# Altium PCB Main_pcb.PcbDoc
Units mm, origin at the board's own origin, x right, y up, seen from the top; angles counter-clockwise.
Board outline 77.22 x 57.4 mm, 2 copper layers (Top Layer, Bottom Layer); 19 components, 38 nets, 87 pads, 0 vias.
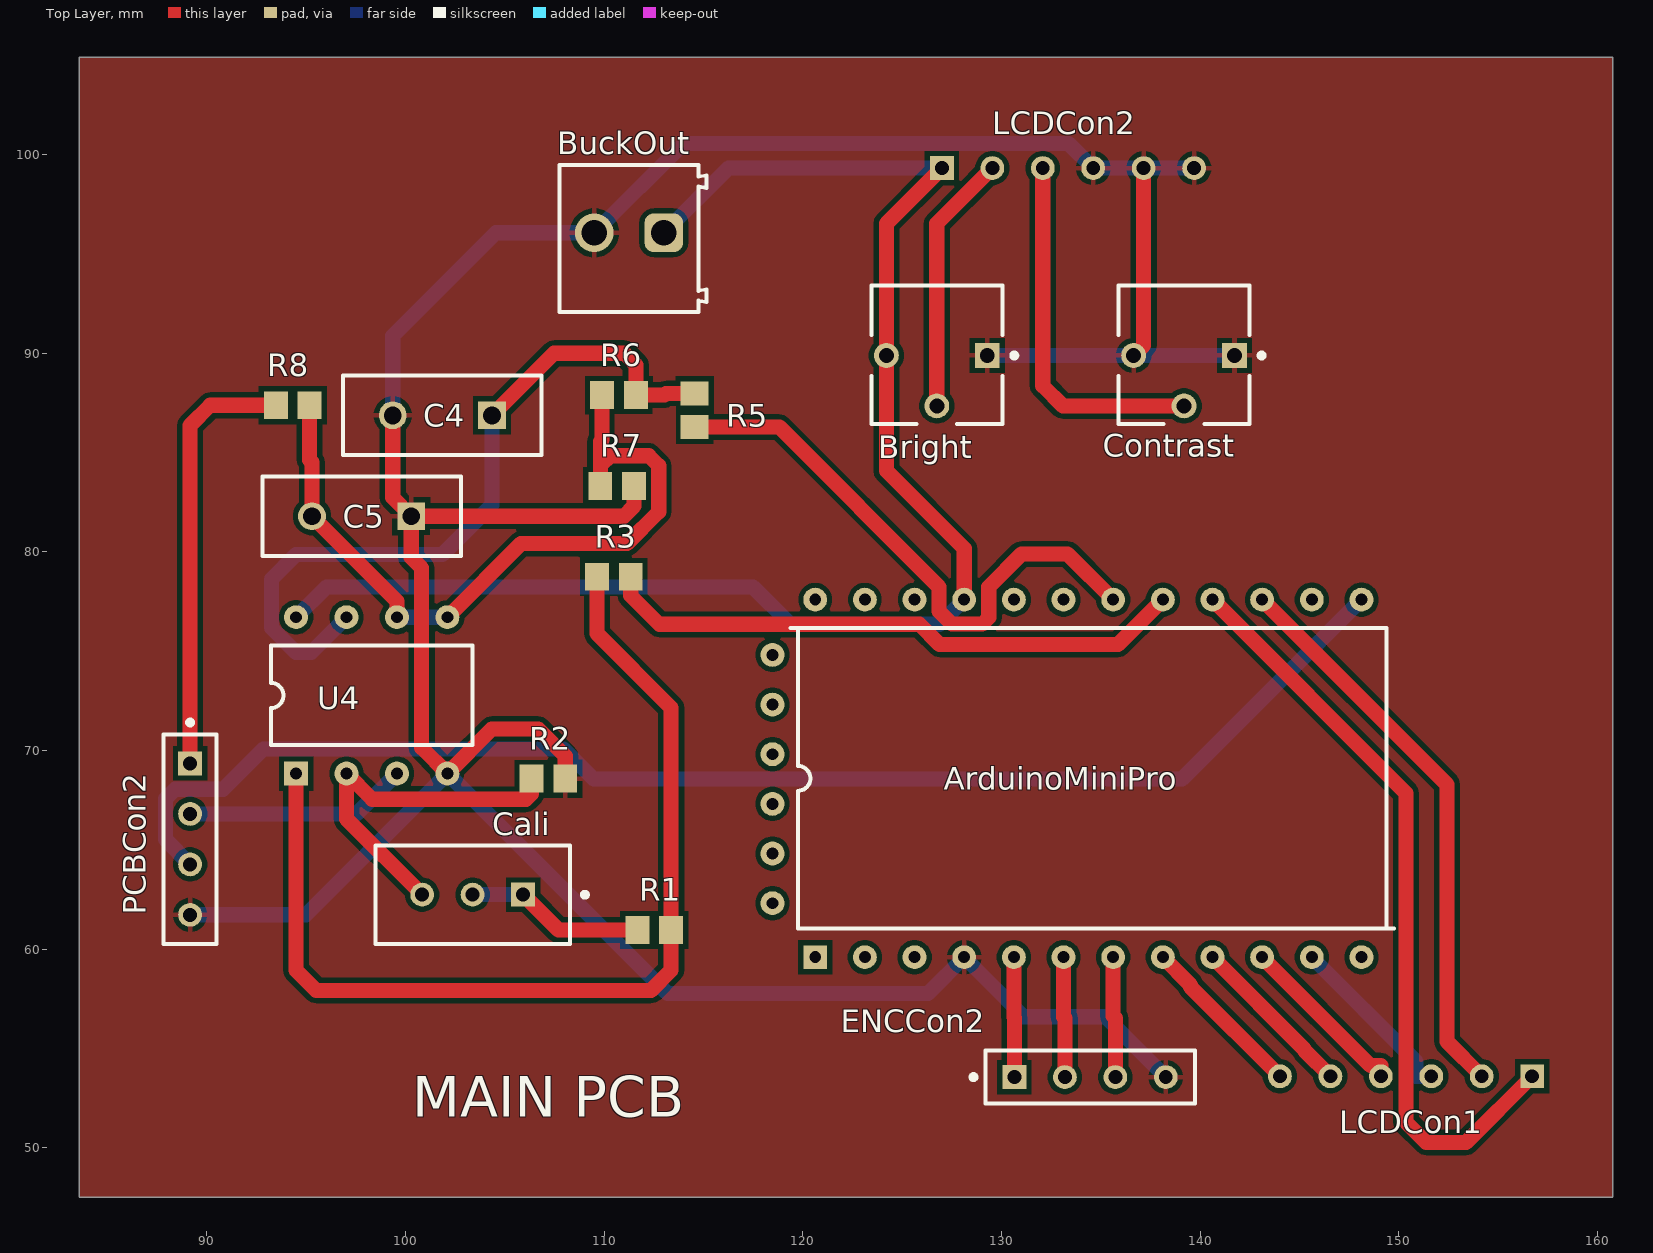
[diagram p0: Top Layer view]
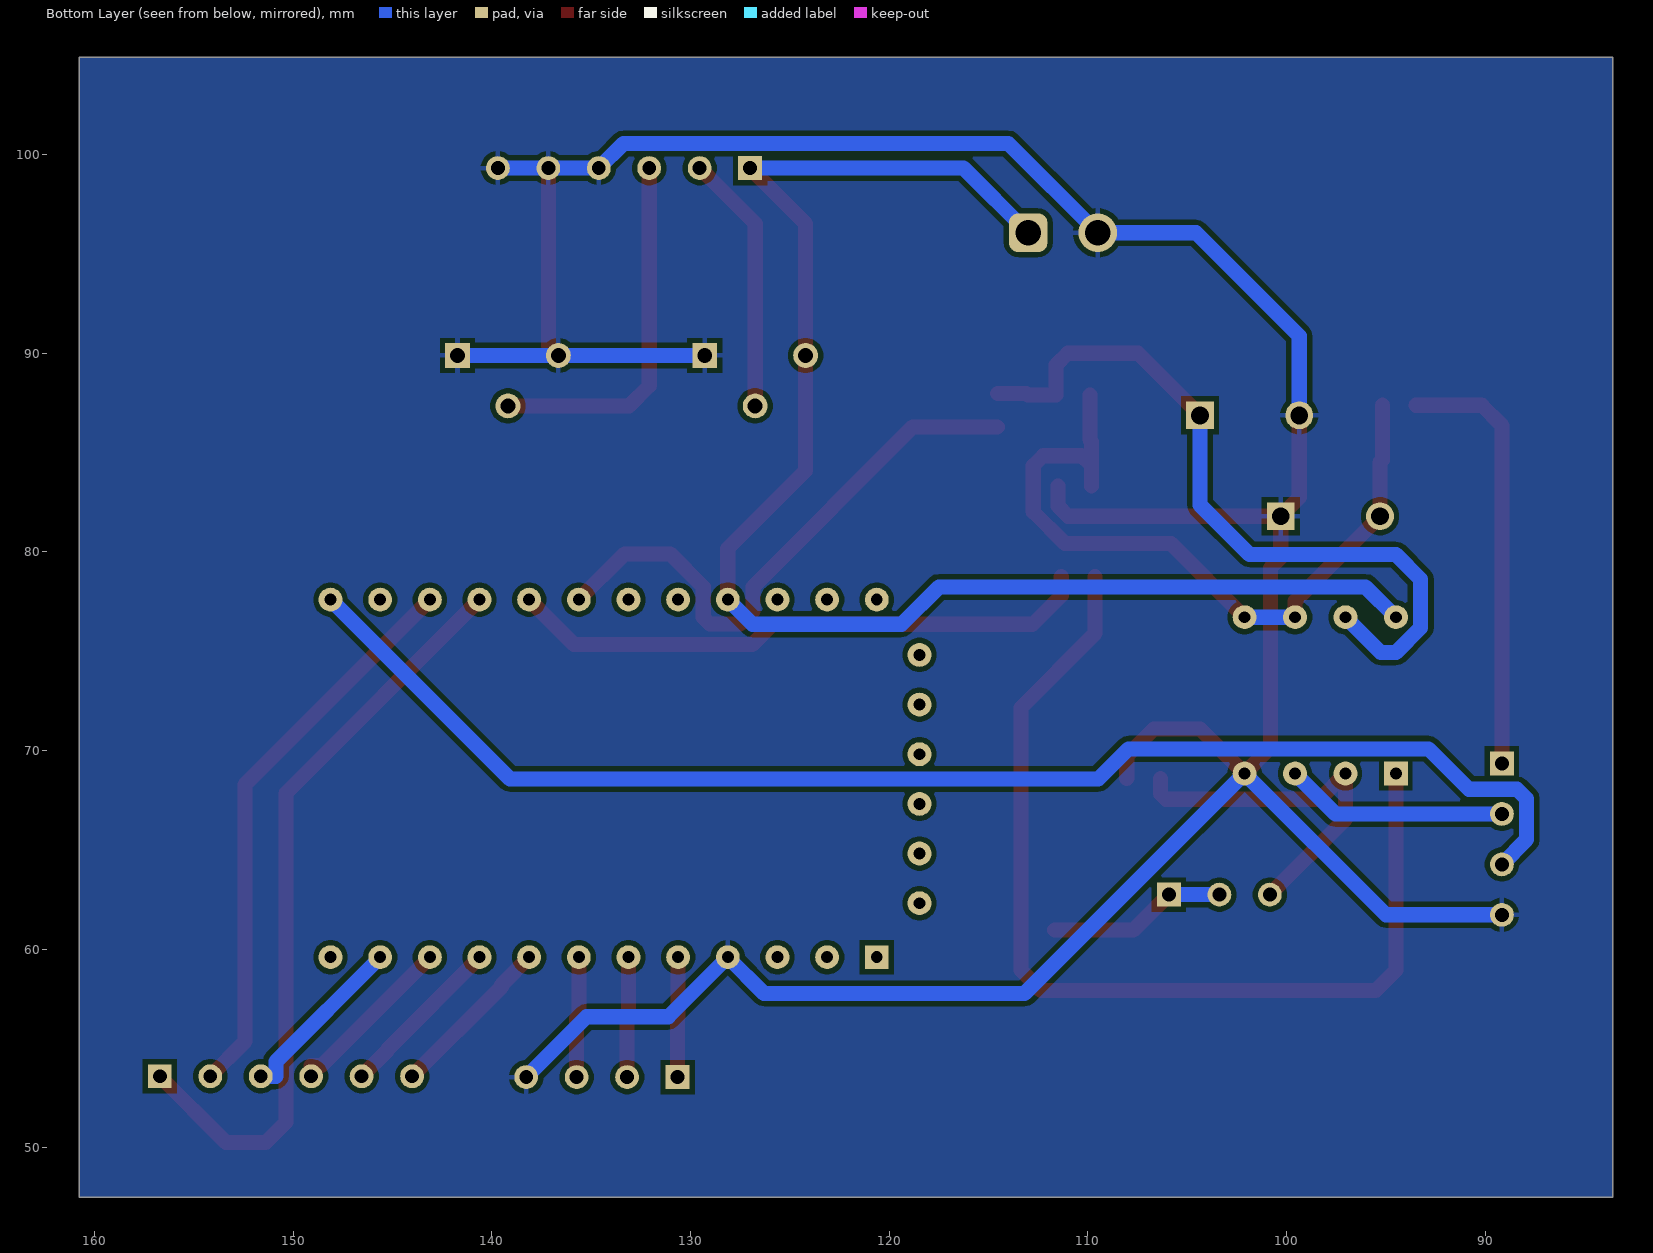
[diagram p1: Bottom Layer view, seen from below]

## Layer stack, top to bottom
Top Solder: solder mask 0.0102, Solder Resist, Dk 3.5
Top Layer: signal copper 0.0356
Dielectric 1: dielectric 0.32, FR-4, Dk 4.8
Bottom Layer: signal copper 0.0356
Bottom Solder: solder mask 0.0102, Solder Resist, Dk 3.5

## Board outline
83.566,47.498 160.782,47.498 160.782,104.902 83.566,104.902

## Design rules (kind name [scope] priority, off if disabled: settings)
Clearance [All] p1: gap=0.254 ignorepadtopadclearanceinfootprint=FALSE
PolygonConnect [All] p1: connectstyle=Relief reliefconductorwidth=0.254 reliefentries=4 polygonreliefangle="90 Angle" airgapwidth=0.254
RoutingVias [All] p1: holewidth=0.711 width=1.27 viastyle="Through Hole" minholewidth=0.711 minwidth=1.27 maxholewidth=0.711 maxwidth=1.27
SolderMaskExpansion [All] p1: expansion=0.102 istentingtop=FALSE
Width [All] p1: maxlimit=0.762 minlimit=0.254 preferedwidth=0.762 minimp=50.000000 maximp=50.000000 favimp=50.000000
30 further rules are at their usual default settings.

## Classes and differential pairs
component class Main: ArduinoMiniPro Bright BuckOut C4 C5 Cali Contrast ENCCon2 LCDCon1 PCBCon2 R1 R2 R3 R5 R6 R7 R8

## Components (designator, comment, footprint, x,y, rotation, side; value= is the part's Value field where it differs from the comment)
ArduinoMiniPro "Arduino_Pro_Mini" Arduino_Mini_Pro 119.38,68.58 r90 top (schematic designator *)
Bright "10k" 10k_Trim_Pot 126.746,89.916 r180 top (schematic designator Brightness)
BuckOut "" screw_terminal 111.252,95.758 r180 top (schematic designator Buck_Conv_Out)
C4 "100n" Capacitor_Monolitoc 101.854,86.868 r180 top
C5 "1uF" Capacitor_Monolitoc 97.79,81.788 r180 top
Cali "500k" 500k_Trim_Pot 103.378,62.733 r0 top value=500kΩ (schematic designator Calibration)
Contrast "10k" 10k_Trim_Pot 139.192,89.916 r180 top
ENCCon2 "" Header-Female-JST_4pin 134.463,53.553 r0 top (schematic designator ENC_Con2)
LCDCon1 "" 6Pin_Connector 156.718,53.594 r180 top (schematic designator LCD_Con_1)
LCDCon2 "" 6Pin_Connector 127,99.314 r0 top (schematic designator LCD_Con_2)
PCBCon2 "" Header-Female-JST_4pin 89.154,65.532 r270 top (schematic designator PCB_CON_2)
R1 "51K" Resistor 112.522,60.96 r0 top
R2 "1K" Resistor 107.188,68.58 r0 top
R3 "470E" Resistor 110.49,78.74 r0 top
R5 "470E" Resistor 114.554,87.122 r270 top
R6 "100K" Resistor 110.744,87.884 r0 top
R7 "1K" Resistor 110.656,83.312 r0 top
R8 "10K" Resistor 94.322,87.376 r0 top
U4 "AD822 or MCP602" DIP8_AD822 94.488,68.834 r90 top

## Footprints (in the part's own frame and the unit in brackets; to place one, negate y for a bottom-side part, rotate by r counter-clockwise, add the part's x,y. Pads: shape width x height; smd on the part's side, far side on the other; paste and mask are expansions set on the pad)
6Pin_Connector [mm]
  rect 1.2x1.2 hole 0.7 paste-2539.97 mask+0: 1(0,0)
  round 1.2 hole 0.7 paste-2539.97 mask+0: 2(2.54,0) 3(5.08,0) 4(7.62,0) 5(10.16,0) 6(12.7,0)
10k_Trim_Pot [mm]
  rect 1.25x1.25 hole 0.75: 1(-2.54,0.035)
  round 1.25 hole 0.75: 2(0,2.575) 3(2.54,0.035)
  silkscreen extent -4.03,-3.49 3.3,3.49, body extent -3.3,-3.49 3.3,3.49, height 4.95
500k_Trim_Pot [mm]
  rect 1.2x1.2 hole 0.7 paste-2539.97 mask+0: 1(2.54,0.005)
  round 1.2 hole 0.7 paste-2539.97 mask+0: 2(0,0.005) 3(-2.54,0.005)
  silkscreen extent -4.89,-2.48 5.77,2.48, body extent -4.99,-2.58 4.99,2.58, height 0.25
Arduino_Mini_Pro [mm]
  rect 1.2x1.2 hole 0.6: 1(-8.992,-1.245)
  round 1.2 hole 0.6: 2(-8.992,-3.745) 3(-8.992,-6.245) 4(-8.992,-8.745) 5(-8.992,-11.245) 6(-8.992,-13.745) 7(-8.992,-16.245) 8(-8.992,-18.745) 9(-8.992,-21.245) 10(-8.992,-23.745) 11(-8.992,-26.245) 12(-8.992,-28.745) 13(9.008,-28.745) 14(9.008,-26.245) 15(9.008,-23.745) 16(9.008,-21.245) 17(9.008,-18.745) 18(9.008,-16.245) 19(9.008,-13.745) 20(9.008,-11.245) 21(9.008,-8.745) 22(9.008,-6.245) 23(9.008,-3.745) 24(9.008,-1.245) 25(6.226,0.906) 26(3.726,0.906) 27(1.226,0.906) 28(-1.274,0.906) 29(-3.774,0.906) 30(-6.274,0.906)
  silkscreen extent -7.56,-30.38 7.57,0.01
Capacitor_Monolitoc [mm]
  rect 1.4x1.4 hole 0.9: 1(-2.5,0)
  round 1.4 hole 0.9: 2(2.5,0)
  silkscreen extent -5,-2 5,2, body extent -5,-2 5,2, height 13
DIP8_AD822 [mm]
  rect 1.2x1.2 hole 0.6: 1(0,0)
  round 1.2 hole 0.6: 2(0,-2.54) 3(0,-5.08) 4(0,-7.62) 5(7.87,-7.62) 6(7.87,-5.08) 7(7.87,-2.54) 8(7.87,0)
  silkscreen extent 1.43,-8.89 6.43,1.27
Header-Female-JST_4pin [mm]
  rect 1.2x1.2 hole 0.7 paste-2539.97 mask+0: 1(-3.81,0)
  round 1.2 hole 0.7 paste-2539.97 mask+0: 2(-1.27,0) 3(1.27,0) 4(3.81,0)
  silkscreen extent -5.99,-1.34 5.27,1.34, body extent -5.37,-1.44 5.37,1.44, height 0.25
Resistor [mm]
  rect 1.2x1.4 smd: 1(-0.85,0) 2(0.85,0)
  body extent -1.1,-0.7 1.1,0.7, height 0.5
screw_terminal [mm]
  rrect50% 1.95x1.95 hole 1.3: 1(-1.75,-0.3)
  round 1.95 hole 1.3: 2(1.75,-0.3)
  silkscreen extent -3.9,-3.7 3.5,3.7, body extent -3.95,-3.7 3.5,3.7, height 8.55

## Part data
Bright Contrast: library part 10k_Trim_Pot, Case Code (Imperial)=0612, Case Code (Metric)=1632, Case/Package=1206, Max Operating Temperature=125degC, Min Operating Temperature=-25degC, Package Quantity=5000, Power Rating="1 W", Resistance="50 mohm", Tolerance=1%, Voltage Rating="220 mV", ComponentLink1Description="Manufacturer URL", ComponentLink1URL=http://www.bourns.com/, ComponentLink2Description=Datasheet, ComponentLink2URL=http://www.bourns.com/docs/Product-Datasheets/3362.pdf, DatasheetVersion=May-16, Height="0.6 mm", Length="3.2 mm", Mount="Surface Mount", PackageDescription="3-Pin Through Hole Device, Body 6.6 x 6.99 mm, Pitch 2.54 mm", PackageReference=3326P, Packaging="Tape and Reel", Pins=2, REACH SVHC="No SVHC", RoHSCompliant=True, Width="1.6 mm"
BuckOut: library part Screw_Terminal, Color="Blue, Green", Current=10A, Max Operating Temperature=105°C, Min Operating Temperature=-40°C, Voltage=300V, Contact Material=Brass, Contact Plating="Brass, Tin", Current Rating=10A, Height=8.7mm, Housing Material=Nylon, Lead Pitch=3.5mm, Length=7.4mm, Mount="Through Hole", NexarPartId=18818288, Number of Contacts=2, Number of Levels=1, Number of Pins=2, Number of Positions Per Level=2, Number of Rows=1, Packaging=Box, Pitch=3.5052mm, Plating="Brass, Steel", REACH SVHC=Unknown, RoHS=Compliant, Stripping Length=-6mm, Termination=Screw, Voltage Rating=300V, Width=7.9mm, Wire Gauge (Max)=24AWG, Wire Gauge (Min)=16AWG, Wire/Cable Gauge=24AWG
C4 C5: library part Capacitor_Monolitic, Capacity (elec.)=10nF, Manufacturer=Murata, Nominal voltage=1000V, Package Description="2-Pin Through Hole Device, Body 4 x 10 mm, Pitch 5 mm", Package Reference=DEBF33A103ZA2B, Tolerance=10%, Category=Ceramiccapacitor, Content=500pc(s), CS=5mm, Datasheet URL=http://psearch.en.murata.com/capacitor/product/DEBF33A103ZA2B.pdf, Datasheet Version=06/2016, Industrial packaging=Yes, Manufacturer URL=http://www.murata.com/, Material=Ceramic, Mounting Technology=ThroughHole, Packaging type=Bulk, Type=radiallead
Cali: library part 500k_Trim_Pot, "TRIMMER 500K OHM 0.5W PC PIN TOP", Manufacturer=Bourns, Manufacturer Part Number=3296W-1-504LF, Package=3296W, Power Rating=0.5W, Resistance=500kΩ, Temperature="-55°C to +125°C", Temperature Coefficient=100ppm/°C, Temperature Range High=+125°C, Temperature Range Low=-55°C, Tolerance=10%, Voltage Rating=300V, Automotive=No, Category=Res, ComponentLink2Description=Datasheet, ComponentLink2URL=https://www.bourns.com/docs/Product-Datasheets/3296.pdf, Device Class L1="Passive Components", Device Class L2=Resistors, Device Class L3="Variable Resistors and Potentiometers", Digikey Description="TRIMMER 500K OHM 0.5W PC PIN TOP", Height=12.05mm, Lead Free=Yes, Mouser Description="Trimmer; Cermet; Rest 500 Kilohms; PCB; 25 Turns; Pwr-Rtg 0.5W", Octopart=https://octopart.com/3296w-1-504lf-bourns-143884, RoHS=TRUE, Series="Trimpot 3296-Sealed", Standoff Height=0.38mm
ENCCon2 PCBCon2: library part Header-Female-JST_4pin, Color=Black, Contact Resistance=10mR, Max Current Rating=1A, Max Operating Temperature=125°C, Min Operating Temperature=-55°C, Package Quantity=1, Connector Type=Receptacle, Contact Material=Copper, Contact Plating=Gold, Depth=2.54mm, Gender=Female, Housing Color=Black, Housing Material=Polyester, Lead Free="Lead Free", Length=10.16mm, Mount="Through Hole", Number of Contacts=4, Number of Positions=4, Number of Rows=1, Orientation=Straight, Packaging=Bulk, Pitch=2.54mm, Radiation Hardening=No, RoHS Compliant=Yes, Series=SS, Termination=Solder, Width=2.54mm
LCDCon1 LCDCon2: library part 6Pin_Connector
R1 R2 R3 R5 R6 R7 R8: library part Resistor, Case/Package=Axial, Max Operating Temperature=175°C, Max Power Dissipation=250mW, Min Operating Temperature=-55°C, Power Rating=125mW, Resistance=73.2kΩ, Temperature Coefficient=50ppm/°C, Tolerance=1%, Voltage Rating=200V, Composition="Metal Film", Diameter=1.65mm, Features="Flame Retardant Coating, Moisture Resistant", Lead Free="Lead Free", Length=3.81mm, Mount="Through Hole", NexarPartId=44386654, Number of Terminations=2, Packaging="Cut Tape", RoHS=Compliant, Schedule B="8533210090, 8533210090|8533210090|8533210090|8533210090|8533210090", Termination=Axial, Voltage Rating (DC)=200V, Width=1.65mm
U4: library part OP_AMP_AD822, Manufacturer="Analog Devices", PartNumber=AD8221ARMZ-R7, Quiescent Current="0.9 mA Typ.", Temperature Range="-40 to 125 degC", -3dB Bandwidth@G="1=825 kHz", ComponentLink1Description="Manufacturer URL", ComponentLink1URL=http://www.analog.com/en/index.html, ComponentLink2Description=Datasheet, ComponentLink2URL=http://www.analog.com/static/imported-files/data_sheets/AD8221.pdf, ComponentLink3Description="Package Specification", ComponentLink3URL=http://www.analog.com/static/imported-files/packages/PKG_PDF/MSOP(RM)/RM_8.pdf, DatasheetVersion="Rev. C", Mounting Technology="Surface Mount", PackageDescription="8-Pin Mini Small Outline Package, Body 3 x 3 mm, Pitch 0.65 mm", PackageVersion=Aug-05, Packing="Tape and Reel", RoHS=TRUE, Slew Rate@G="1=2 V/us Typ.", VIO="60 uV Max."

## Nets (pads, with @x,y where several pads share a name; then routed paths per layer and width w, separated by ;. In a path a pad name is that pad's centre, name@x,y a point inside that pad or via, vN(x,y) a via of type N, cw(c..) or ccw(c..) an arc to the next point about the centre after c; other vN are vias at no path point)
GND: ArduinoMiniPro.4 Bright.1 BuckOut.2 C4.2 C5.1 Contrast.1 Contrast.3 ENCCon2.4 LCDCon2.4 LCDCon2.5 LCDCon2.6 PCBCon2.4 R2.2 R7.2 U4.4 | length 171
  Top Layer w0.762: C4.2 99.354,82.724 C5.1 ; R2.2 108.038,69.711 106.68,71.069 104.343,71.069 U4.4 100.813,70.129 100.813,79.183 100.29,79.705 C5.1 ; R7.2 111.506,82.296 110.998,81.788 C5.1 ; Contrast.3 137.16,90.389 LCDCon2.5
  Bottom Layer w0.762: PCBCon2.4 94.996,61.722 U4.4 113.182,57.76 126.296,57.76 ArduinoMiniPro.4 131.122,56.591 135.235,56.591 ENCCon2.4 ; C4.2 99.354,90.861 104.551,96.058 BuckOut.2 114.003,100.559 133.375,100.559 LCDCon2.4 LCDCon2.5 LCDCon2.6 ; Bright.1 Contrast.3 Contrast.1
Net3_1: 
Net5mm_connector_24V_2: 
Net*_5: ArduinoMiniPro.5 ENCCon2.1 | length 6
  Top Layer w0.762: ArduinoMiniPro.5 130.625,56.569 130.653,56.54 ENCCon2.1
Net*_6: ArduinoMiniPro.6 ENCCon2.2 | length 6.1
  Top Layer w0.762: ArduinoMiniPro.6 133.125,56.583 133.193,56.515 ENCCon2.2
Net*_7: ArduinoMiniPro.7 ENCCon2.3 | length 6.1
  Top Layer w0.762: ArduinoMiniPro.7 135.625,56.623 135.733,56.515 ENCCon2.3
Net*_8: ArduinoMiniPro.8 LCDCon1.6 | length 8.4
  Top Layer w0.762: ArduinoMiniPro.8 139.522,58.191 139.522,58.09 LCDCon1.6
Net*_9: ArduinoMiniPro.9 LCDCon1.5 | length 8.5
  Top Layer w0.762: ArduinoMiniPro.9 145.263,54.95 145.263,54.889 LCDCon1.5
Net*_10: ArduinoMiniPro.10 LCDCon1.4 | length 8.8
  Top Layer w0.762: ArduinoMiniPro.10 148.586,54.127 149.098,54.127 LCDCon1.4
Net*_11: ArduinoMiniPro.11 LCDCon1.3 | length 8.9
  Bottom Layer w0.762: ArduinoMiniPro.11 150.876,54.337 150.876,53.594 LCDCon1.3
Net*_13: ArduinoMiniPro.13 PCBCon2.3 | length 69.4
  Bottom Layer w0.762: PCBCon2.3 87.909,65.507 87.909,67.564 88.392,68.047 90.815,68.047 92.847,70.079 107.95,70.079 109.474,68.555 139.091,68.555 ArduinoMiniPro.13
Net*_15: ArduinoMiniPro.15 LCDCon1.2 | length 28.6
  Top Layer w0.762: ArduinoMiniPro.15 152.425,68.288 152.425,55.347 LCDCon1.2
Net*_16: ArduinoMiniPro.16 LCDCon1.1 | length 38.5
  Top Layer w0.762: ArduinoMiniPro.16 150.368,67.845 150.368,51.283 151.384,50.267 153.391,50.267 LCDCon1.1
Net*_17: ArduinoMiniPro.17 R3.2 | length 29.7
  Top Layer w0.762: R3.2 111.34,77.788 112.776,76.352 125.874,76.352 126.889,75.337 135.874,75.337 ArduinoMiniPro.17
Net*_18: ArduinoMiniPro.18 R5.2 | length 29.2
  Top Layer w0.762: R5.2 118.82,86.272 126.86,78.232 126.86,77.002 127.508,76.353 129.032,76.353 129.362,76.684 129.362,78.232 131.013,79.883 133.33,79.883 ArduinoMiniPro.18
Net*_21: ArduinoMiniPro.21 Bright.3 BuckOut.1 LCDCon2.1 U4.8 | length 75.4
  Top Layer w0.762: LCDCon2.1 124.206,96.52 Bright.3 124.206,84.075 128.125,80.157 ArduinoMiniPro.21
  Bottom Layer w0.762: U4.8 96.016,78.232 117.5,78.232 119.38,76.352 126.889,76.352 ArduinoMiniPro.21 ; BuckOut.1 116.258,99.314 LCDCon2.1
NetBrightness_2: Bright.2 LCDCon2.2 | length 13.1
  Top Layer w0.762: Bright.2 126.746,96.52 LCDCon2.2
NetC1_1: 
NetC1_2: 
NetC2_2: 
NetC3_1: 
NetC4_1: C4.1 R5.1 R6.2 U4.7 | length 37.9
  Top Layer w0.762: C4.1 107.478,89.992 111.01,89.992 111.594,89.408 R6.2 113.03,87.884 113.118,87.972 R5.1
  Bottom Layer w0.762: U4.7 95.254,74.93 94.488,74.93 93.243,76.175 93.243,78.613 94.488,79.858 101.854,79.858 104.354,82.358 C4.1
NetC5_2: C5.2 R6.1 R7.1 R8.2 U4.5 U4.6 | length 38.2
  Top Layer w0.762: R8.2 95.172,84.624 95.29,84.506 C5.2 99.568,77.51 U4.6 ; U4.5 105.82,80.416 111.15,80.416 112.751,82.017 112.751,84.328 112.243,84.836 110.314,84.836 109.806,84.328 ; R7.1 109.806,84.328 ; R6.1 109.894,85.635 109.806,85.547 109.806,84.328
  Bottom Layer w0.762: U4.6 U4.5
NetCalibration_1: Cali.1 Cali.2 R1.1 | length 9
  Top Layer w0.762: Cali.1 107.696,60.96 R1.1
  Bottom Layer w0.762: Cali.2 Cali.1
NetCalibration_3: Cali.3 R2.1 U4.2 | length 18.4
  Top Layer w0.762: Cali.3 97.028,66.548 U4.2 98.322,67.54 106.06,67.54 106.338,67.818 R2.1
NetContrast_2: Contrast.2 LCDCon2.3 | length 18.5
  Top Layer w0.762: LCDCon2.3 132.08,88.357 133.096,87.341 Contrast.2
NetD1_2: 
NetD2_1: 
NetL1_2: 
NetNPN1_2: 
NetNPN1_3: 
NetNPN2_2: 
NetNPN2_3: 
NetPCB_Con_1_1: 
NetPCB_Con_1_3: 
NetPCB_CON_2_1: PCBCon2.1 R8.1 | length 21.8
  Top Layer w0.762: PCBCon2.1 89.154,86.36 90.17,87.376 R8.1
NetPCB_CON_2_2: PCBCon2.2 U4.3 | length 11.3
  Bottom Layer w0.762: PCBCon2.2 97.536,66.802 U4.3
NetR1_2: R1.2 R3.1 U4.1 | length 51
  Top Layer w0.762: U4.1 94.488,58.928 95.504,57.912 112.356,57.912 113.372,58.928 R1.2 113.372,72.15 109.64,75.882 R3.1
pads on no net: ArduinoMiniPro.1 ArduinoMiniPro.2 ArduinoMiniPro.3 ArduinoMiniPro.12 ArduinoMiniPro.14 ArduinoMiniPro.19 ArduinoMiniPro.20 ArduinoMiniPro.22 ArduinoMiniPro.23 ArduinoMiniPro.24 ArduinoMiniPro.25 ArduinoMiniPro.26 ArduinoMiniPro.27 ArduinoMiniPro.28 ArduinoMiniPro.29 ArduinoMiniPro.30

## Polygon pours and split planes (outlines as drawn)
GND on Bottom Layer "GND_L02_P001" (solid, pour order 1): 83.566,104.902 160.782,104.902 160.782,47.498 83.566,47.498
GND on Top Layer "GND_L01_P000" (solid, pour order 0): 83.566,104.902 160.782,104.902 160.782,47.498 83.566,47.498

## Silkscreen, mask and mechanical layers (free items; w line width, h text height)
Top Overlay:
  text "MAIN PCB" at 100.33,51.562 h2.03